# Altium PCB Core48.PcbDoc
Units mil, origin at the board's own origin, x right, y up, seen from the top; angles counter-clockwise.
Board outline 1027.57 x 2027.57 mil, 2 copper layers (Top Layer, Bottom Layer); 23 components, 43 nets, 133 pads, 49 vias.
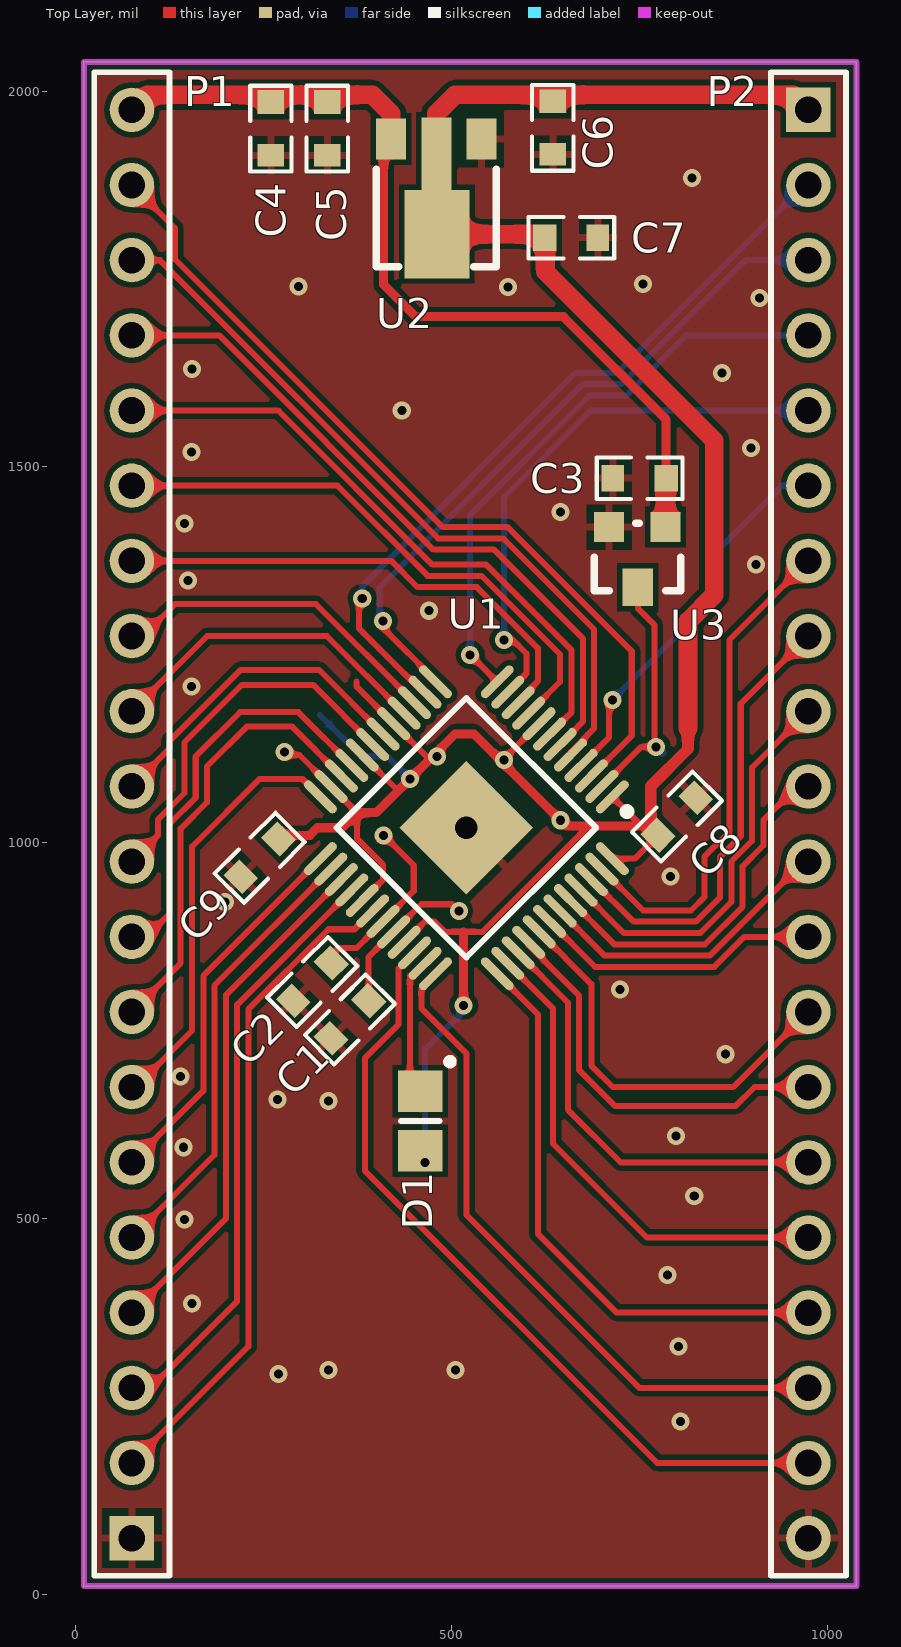
[diagram p0: Top Layer view]
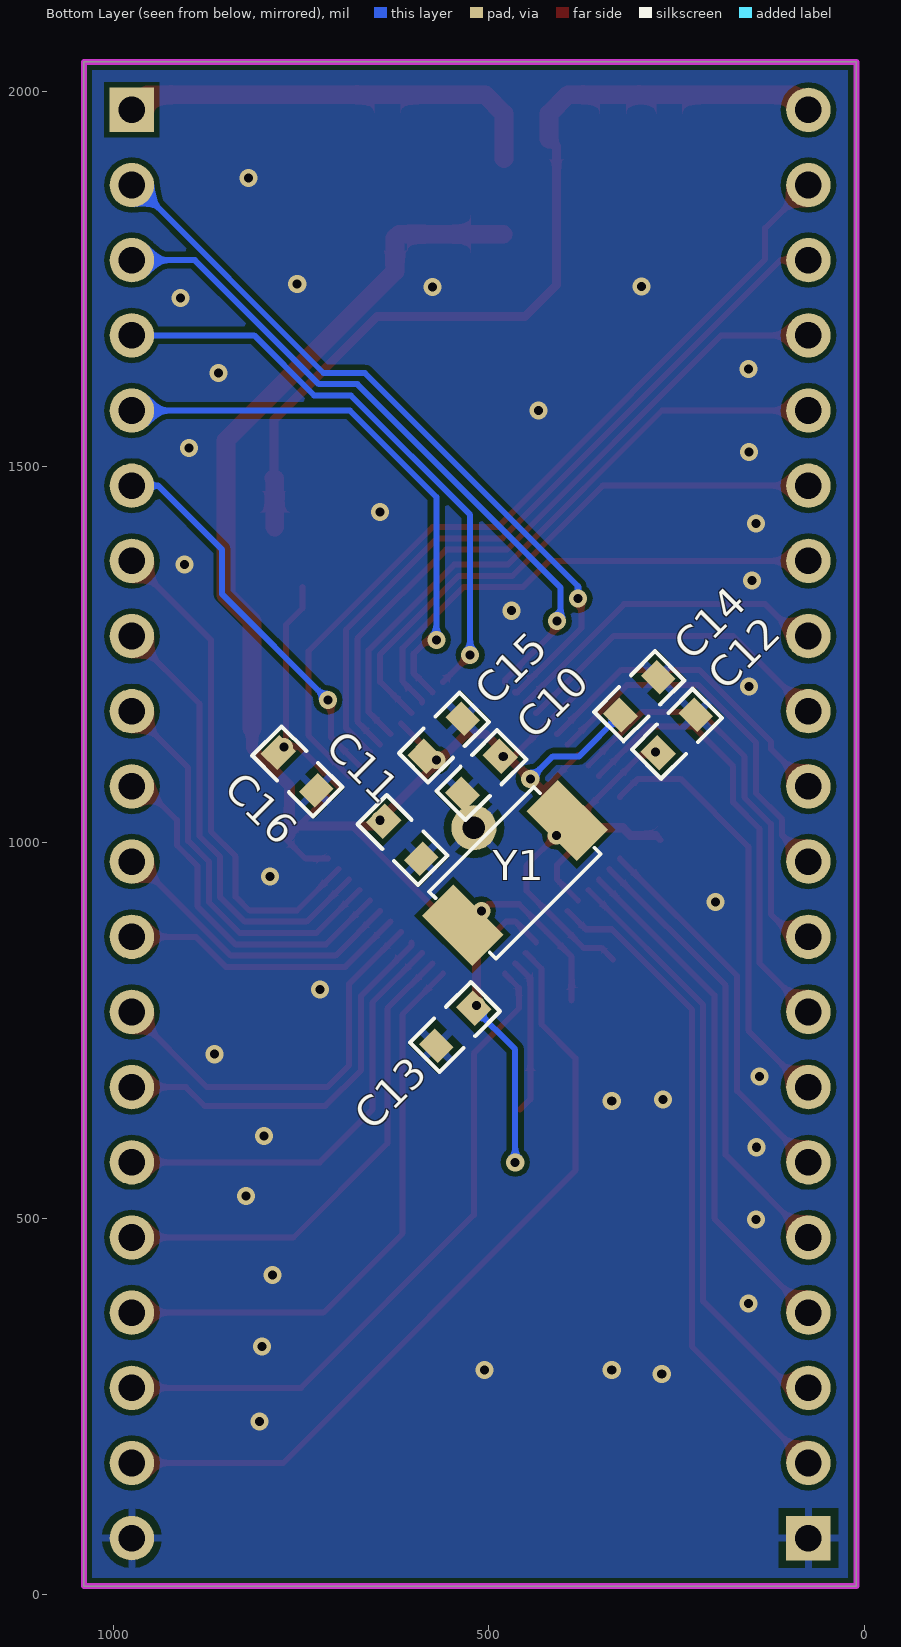
[diagram p1: Bottom Layer view, seen from below]

## Layer stack, top to bottom
Top Solder: solder mask 0.4, Solder Resist, Dk 3.5
Top Layer: signal copper 1.4
Dielectric 1: dielectric 12.6, FR-4, Dk 4.8
Bottom Layer: signal copper 1.4
Bottom Solder: solder mask 0.4, Solder Resist, Dk 3.5

## Board outline
11.22,11.22 11.22,2038.78 1038.78,2038.78 1038.78,11.22

## Design rules (kind name [scope] priority, off if disabled: settings)
Clearance [All] p1: gap=7 ignorepadtopadclearanceinfootprint=TRUE
PlaneConnect [All] p1: pad.planeconnectstyle=Relief pad.reliefexpansion=20 pad.reliefentries=4 pad.reliefconductorwidth=10 pad.reliefairgap=10 via.planeconnectstyle=Direct via.reliefexpansion=20 via.reliefentries=4 via.reliefconductorwidth=10 via.reliefairgap=10
PolygonConnect [All] p1: thpad.connectstyle=Relief thpad.reliefconductorwidth=10 thpad.reliefentries=4 thpad.polygonreliefangle="90 Angle" thpad.airgapwidth=10 smdpad.connectstyle=Relief smdpad.reliefconductorwidth=10 smdpad.reliefentries=4 smdpad.polygonreliefangle="90 Angle" smdpad.airgapwidth=10 via.connectstyle=Direct via.reliefconductorwidth=10 via.reliefentries=4 via.polygonreliefangle="90 Angle" via.airgapwidth=10
RoutingVias [All] p1: holewidth=12 width=24 viastyle="Through Hole" minholewidth=12 minwidth=24 maxholewidth=12 maxwidth=24
SolderMaskExpansion [All] p1: expansion=4
UnRoutedNet [All] p1: checkbadconnections=TRUE
Width [InNet('No Net')] p1: maxlimit=25 minlimit=8 preferedwidth=8
28 further rules are at their usual default settings.

## Components (designator, comment, footprint, x,y, rotation, side; value= is the part's Value field where it differs from the comment)
C1 "Cap" 0603C 365,765 r45 top value=100pF
C2 "Cap" 0603C 315,815 r45 top value=100pF
C3 "Cap" 0603C 750.43,1485 r0 top value=100nF
C4 "Cap" 0603C 260,1950 r90 top value=10uF
C5 "Cap" 0603C 335,1950 r90 top value=100nF
C6 "Cap" 0603C 635,1951.16 r90 top value=10uF
C7 "Cap" 0603C 659.57,1805 r180 top value=100nF
C8 "Cap" 0603C 800,1035 r225 top value=100nF
C9 "Cap" 0603C 245.05,980.05 r45 top value=100nF
C10 "Cap" 0603C 510.05,1089.95 r135 bottom value=100nF
C11 "Cap" 0603C 615,1003.79 r45 bottom value=100nF
C12 "Cap" 0603C 249.95,1145.05 r315 bottom value=100nF
C13 "Cap" 0603C 545,755 r135 bottom value=100nF
C14 "Cap" 0603C 300,1195 r315 bottom value=100nF
C15 "Cap" 0603C 560,1140 r315 bottom value=100nF
C16 "Cap" 0603C 755,1095 r45 bottom value=100nF
D1 "1N4148" 6-0805_Diode 458.79,630 r90 top
P1 "Header 20" HDR1X20 75,75 r90 top locked
P2 "Header 20" HDR1X20 975,1975 r270 top locked
U1 "ELF2_QFP48" TSQFP48-7*7 520,1020 r225 top locked
U2 "PT5110-3V3" SOT-89-3 478.18,1935.59 r180 top
U3 "REF3033" SOT23 789.88,1420.63 r180 top
Y1 "XTAL" XTAL-5032 465.43,960 r315 bottom locked

## Footprints (in the part's own frame and the unit in brackets; to place one, negate y for a bottom-side part, rotate by r counter-clockwise, add the part's x,y. Pads: shape width x height; smd on the part's side, far side on the other; paste and mask are expansions set on the pad)
6-0805_Diode [mm] "Chip Resistor, Body 2.0x1.2mm, IPC Low Density"
  rect 1.4x1.5 smd: 1(-1,0) 2(1,0)
  silkscreen extent 0,-1.1 2.1,0.65, body extent -1.07,-0.7 1.07,0.7, height 0.7
0603C [mm]
  rect 0.762x0.9 smd: 1(-0.9,0)
  rect 0.8x0.9 smd: 2(0.9,0)
  silkscreen extent -1.45,-0.7 1.45,0.7
HDR1X20 [mm] "Connector; Header; 20 Position"
  rect 1.5x1.5 hole 0.9: 1(0,0)
  round 1.5 hole 0.9: 2(2.54,0) 3(5.08,0) 4(7.62,0) 5(10.16,0) 6(12.7,0) 7(15.24,0) 8(17.78,0) 9(20.32,0) 10(22.86,0) 11(25.4,0) 12(27.94,0) 13(30.48,0) 14(33.02,0) 15(35.56,0) 16(38.1,0) 17(40.64,0) 18(43.18,0) 19(45.72,0) 20(48.26,0)
  silkscreen extent -1.27,-1.27 49.53,1.27
SOT23 [mil]
  rect 40x40 smd: 1(4.88,0.63) 3(79.88,0.63)
  rect 40x50 smd: 2(41.88,80.63)
  silkscreen extent -15,-4 100,86
SOT-89-3 [mil]
  rect 40x55 smd: 1(-61.82,-0.57) 3(58.18,-0.57)
  rect 86.61x118.11 smd: 2(-2.76,125.98)
  rect 40x110.24 smd: 2(-1.82,25.59)
  silkscreen extent -82,39 78,169
TSQFP48-7*7 [mm] "TSQFP, 48-Leads, Body 7.00x7.00mm, Pitch 0.50mm, Thermal Pad 3.20x3.20mm, IPC Medium Density"
  oval 1.45x0.3 smd: 1(-4.225,2.75) 2(-4.225,2.25) 3(-4.225,1.75) 4(-4.225,1.25) 5(-4.225,0.75) 6(-4.225,0.25) 7(-4.225,-0.25) 8(-4.225,-0.75) 9(-4.225,-1.25) 10(-4.225,-1.75) 11(-4.225,-2.25) 12(-4.225,-2.75) 25(4.225,-2.75) 26(4.225,-2.25) 27(4.225,-1.75) 28(4.225,-1.25) 29(4.225,-0.75) 30(4.225,-0.25) 31(4.225,0.25) 32(4.225,0.75) 33(4.225,1.25) 34(4.225,1.75) 35(4.225,2.25) 36(4.225,2.75)
  oval 0.3x1.45 smd: 13(-2.75,-4.225) 14(-2.25,-4.225) 15(-1.75,-4.225) 16(-1.25,-4.225) 17(-0.75,-4.225) 18(-0.25,-4.225) 19(0.25,-4.225) 20(0.75,-4.225) 21(1.25,-4.225) 22(1.75,-4.225) 23(2.25,-4.225) 24(2.75,-4.225) 37(2.75,4.225) 38(2.25,4.225) 39(1.75,4.225) 40(1.25,4.225) 41(0.75,4.225) 42(0.25,4.225) 43(-0.25,4.225) 44(-0.75,4.225) 45(-1.25,4.225) 46(-1.75,4.225) 47(-2.25,4.225) 48(-2.75,4.225)
  round 1.524 hole 0.762: 49(0,0)
  rect 3.2x3.2 smd: 49(0,0)
  silkscreen extent -4.35,-3.1 3.1,3.57, body extent -3.5,-3.5 3.5,3.5, height 1.6
XTAL-5032 [mm]
  rect 1.5x2.4 smd: 1(-2.5,0) 2(2.5,0)
  silkscreen extent -2.5,-1.6 2.5,1.6

## Part data
C1 C2 C3 C4 C5 C6 C7 C8 C9 C10 C11 C12 C13 C14 C15 C16: "Capacitor", LatestRevisionDate=17-Jul-2002, LatestRevisionNote="Re-released for DXP Platform.", PackageDescription="Radial Cap, Thru-Hole; 2 Leads; 0.3 in Pin Spacing", PackageReference=RAD-0.3, Published=8-Jun-2000, Publisher="Altium Limited"
D1: library part Diode, "Default Diode", Code_JEDEC=DO-214-AB, LatestRevisionDate=17-Jul-2002, LatestRevisionNote="Re-released for DXP Platform.", PackageDescription="DO-214-AB/SMC; 2 C-Bend Leads; Body 7.9 x 5.9 mm, inc. leads (LxW)", PackageReference=SMC, PackageVersion=Sep-1996, Published=8-Jun-2000, Publisher="Altium Limited"
P1 P2: "Header, 20-Pin", LatestRevisionDate=17-Jul-2002, LatestRevisionNote="Re-released for DXP Platform.", Publisher="Altium Limited"
U2: library part PT5110
U3: library part REF30xx
Y1: "Crystal Oscillator", LatestRevisionDate=17-Jul-2002, LatestRevisionNote="Re-released for DXP Platform.", PackageDescription="Crystal, Thru-Hole; 2 Leads; Body 3.1 x 8.2 mm (Dia.xH)", PackageReference=R38, Published=8-Jun-2000, Publisher="Altium Limited"

## Via types
v1: diameter 24, hole 12, Top Layer to Bottom Layer, 49 vias

## Nets (pads, with @x,y where several pads share a name; then routed paths per layer and width w, separated by ;. In a path a pad name is that pad's centre, name@x,y a point inside that pad or via, vN(x,y) a via of type N, cw(c..) or ccw(c..) an arc to the next point about the centre after c; other vN are vias at no path point)
3V3: C6.2 C7.2 C8.2 C9.2 C10.2 C11.2 C12.2 C13.2 C14.2 C15.2 D1.1 P2.1 U1.1 U1.8 U1.17 U1.20 U1.23 U1.29 U1.33 U1.48 U2.2 | length 3699.9
  Top Layer w8: C9.2@271.74,1003.48 C9.2@278.26,1010 ; v1@285,1116.74 297.98,1116.74 U1.23 374.73,1040 374.73,1005.33 409.34,970.71 409.34,951.1 U1.29 ; 373.92,1214.46 373.92,1207.84 U1.17 468.75,1113.01 ; U1.20 425.74,1072.5 432.5,1072.5 ; U1.33 465.02,895.42 477.16,895.42 491.08,881.5 516.29,881.5 541.5,881.5 682.08,1022.08 685,1022.08 ; v1@566,1109 567.25,1109 U1.8 ; U1.48 743.94,978.94 C8.2@770.12,1005.12 ; U1.1 753.16,1022.08 C8.2@765.29,1009.95
  Top Layer w12: C9.2@278.26,1010 311.84,1010 321.84,1020 354.73,1020 374.73,1040 400,1040 432.5,1072.5 v1(445,1085) 468.75,1108.75 ; v1@477.97,1117.97 505,1145 530,1145 566,1109 v1(645,1030) ; v1(516.29,783.71) 516.29,881.5 ; v1@652.93,1022.08 682.08,1022.08 ; 685,1022.08 753.16,1022.08
  Top Layer w15: C8.2@765.29,1009.95 765.29,1075.29 815,1125 815,1152.17
  Top Layer w25: U2.2@480,1910 480,1970 505,1995 955,1995 P2.1 ; U2.2@480.94,1809.61 619.53,1809.61 C7.2 625,1804.13 625,1760 849.85,1535.15 849.85,1329.8 815,1294.95 815,1152.17
  Bottom Layer w8: C14.2 380,1115 415,1115 v1(445,1085) ; v1(465,575) 465,725.11 C13.2 v1(516.29,783.71)
  other v1: 570.05,1110 480.94,1115 278.26,1120.67
GND: C1.1 C2.1 C3.1 C4.1 C5.1 C6.1 C7.1 C8.1 C9.1 C10.1 C11.1 C12.1 C13.1 C14.1 C15.1 C16.1 P1.1 P2.20 U1.49 U2.1 U3.3
  other v1: 805,230 270.11,293.42 336.62,298.56 505.63,298.56 801.92,330 155,387.15 787.78,425 145,498.65 823.13,530 143.78,595 798.98,610 336.62,656.58 268.73,658.79 140,689.18 865,718.73 724.65,805 198.79,921.22 791.44,955 154.17,1207.84 470,1308.7 150,1348.95 905,1370 145,1425 645.17,1440 154.17,1520 898.72,1525 434.06,1575 860,1625 155,1630 910,1725 575.15,1739.41 296.8,1740 755,1743.09 820,1884.54
IO0: P1.19 U1.3 | length 1134.5
  Top Layer w8: P1.19 132.44,1817.56 132.44,1775.99 488.43,1420 575,1420 740,1255 740,1142.56 U1.3
IO1: P1.18 U1.5 | length 998.6
  Top Layer w8: P1.18 112.22,1775 482.22,1405 568.79,1405 690,1283.79 690,1152.17 658.5,1120.67 U1.5
IO2: P1.17 U1.6 | length 920.9
  Top Layer w8: P1.17 191,1675 476,1390 557,1390 675,1272 675,1161.08 U1.6
IO3: P1.16 U1.7 | length 840.9
  Top Layer w8: P1.16 269.79,1575 474.79,1370 546.35,1370 660,1256.35 660,1173.92 U1.7
IO4: P1.15 U1.9 | length 758
  Top Layer w8: P1.15 348.58,1475 468.58,1355 540.13,1355 644.58,1250.55 644.58,1214.18 U1.9
IO5: P1.14 U1.10 | length 671.5
  Top Layer w8: P1.14 420,1375 455,1340 533.92,1340 615,1258.92 615,1215 588.9,1188.9 U1.10
IO6: P1.13 U1.15 | length 448
  Top Layer w8: P1.13 90,1275 132.44,1317.44 320,1317.44 U1.15
IO7: P1.12 U1.16 | length 446.1
  Top Layer w8: P1.12 175,1275 334.6,1275 U1.16
IO8: P1.11 U1.18 | length 451.3
  Top Layer w8: P1.11@86.5,1075 P1.11 125,1125 125,1135 220,1230 323.92,1230 U1.18
IO9: P1.10 U1.19 | length 502.5
  Top Layer w8: P1.10 110,1010 110,1031.21 145,1066.21 145,1133.5 221.5,1210 316.08,1210 U1.19
IO10: P1.9 U1.21 | length 548.3
  Top Layer w8: P1.9 95,875 125,905 125,1025 160,1060 160,1115 218.9,1173.9 296.5,1173.9 U1.21
IO11: P1.8 U1.22 | length 596.3
  Top Layer w8: P1.8 140,840 140,1018.79 175,1053.79 175,1101.74 228.26,1155 287.56,1155 U1.22
IO12: P1.7 U1.24 | length 574.1
  Top Layer w8: P1.7 80,675 155,750 155,995 245,1085 301.89,1085 U1.24
IO13: P1.6 U1.25 | length 507.8
  Top Layer w8: P1.6 170,670 170,823.11 U1.25
IO14: P1.5 U1.26 | length 599.7
  Top Layer w8: P1.5 185,585 185,810.27 U1.26
IO15: P1.4 U1.27 | length 691.5
  Top Layer w8: P1.4 200,500 200,797.44 U1.27
IO16: P1.3 U1.28 | length 798
  Top Layer w8: P1.3 100,275 215,390 215,784.6 U1.28
IO17: P1.2 U1.30 | length 887.3
  Top Layer w8: P1.2 230,330 230,778.38 336.62,885 371.08,885 U1.30
IO18: P2.19 U1.34 | length 1068.3
  Top Layer w8: U1.34 430,832.56 430,758.5 385,713.5 385,563.79 773.79,175 P2.19
IO19: P2.18 U1.36 | length 913.8
  Top Layer w8: U1.36 460,806.89 460,780 520,720 520,505 750,275 P2.18 P2.18@985,275
IO20: P2.17 U1.37 | length 771.7
  Top Layer w8: U1.37 615,771.89 615,480 720,375 P2.17
IO21: P2.16 U1.38 | length 656.4
  Top Layer w8: U1.38 635,779.73 635,600 760,475 P2.16
IO22: P2.15 U1.39 | length 585
  Top Layer w8: U1.39 655,787.56 655,645 725,575 P2.15
IO23: P2.14 U1.40 | length 532.9
  Top Layer w8: U1.40 602.82,863.65 670,796.47 670,697.55 717.55,650 878.3,650 903.3,675 P2.14
IO24: P2.13 U1.41 | length 548.6
  Top Layer w8: U1.41 686.34,811.9 686.34,703.66 715,675 875,675 P2.13
IO25: P2.12 U1.42 | length 385.9
  Top Layer w8: U1.42 691.08,835 849.85,835 889.85,875 P2.12
IO26: P2.11 U1.43 | length 406.8
  Top Layer w8: U1.43 703.92,850 843.64,850 968.64,975 P2.11
IO27: P2.10 U1.44 | length 478.8
  Top Layer w8: U1.44 716.76,865 837.43,865 887.5,915.07 887.5,968.86 915,996.36 915,1030 960,1075 P2.10
IO28: P2.9 U1.45 | length 537
  Top Layer w8: U1.45 729.6,880 831.21,880 872.5,921.29 872.5,975.07 900,1002.57 900,1100 P2.9
IO29: P2.8 U1.46 | length 604
  Top Layer w8: U1.46 742.44,895 825,895 857.5,927.5 857.5,981.29 885,1008.79 885,1185 P2.8
IO30: P2.7 U1.47 | length 671
  Top Layer w8: U1.47 755.27,910 818.79,910 836.89,928.11 836.89,981.89 870,1015 870,1270 P2.7
NetC1_2: C1.2 U1.32 Y1.2 | length 210.8
  Top Layer w8: C1.2 390.05,848.3 U1.32 460,918.24 501.1,918.24 v1(510,909.34)
NetC2_2: C2.2 U1.31 Y1.1 | length 250.2
  Top Layer w8: C2.2@335.05,845.05 350,860 373.92,860 U1.31 450,936.08 450,970 v1(410,1010) v1@405,1015
NetD1_2: D1.2 U1.35 | length 208.7
  Top Layer w8: D1.2@458.79,645 445,658.79 445,819.73 U1.35
RePGM: P2.6 U1.4 | length 516.3
  Top Layer w8: U1.4 710,1140.4 v1@710,1190
  Bottom Layer w8: v1(714.18,1190) 855,1330.82 855,1390 940,1475 P2.6
TCK: P2.4 U1.12 | length 786
  Top Layer w8: v1(525,1250) 560.82,1214.18 U1.12
  Bottom Layer w8: v1(525,1250) 525,1436.21 683.79,1595 732.43,1595 812.43,1675 P2.4
TDI: P2.3 U1.13 | length 907.2
  Top Layer w8: v1(409.34,1295) 409.34,1285.66 478.94,1216.06 U1.13
  Bottom Layer w8: v1(409.34,1295) 409,1295 404.5,1299.5 404.5,1339.5 675,1610 726.21,1610 891.21,1775 P2.3
TDO: P2.2 U1.14 | length 995.7
  Top Layer w8: v1(381.5,1325) 377,1320.5 377,1285.47 462.22,1200.26 U1.14
  Bottom Layer w8: v1(381.5,1325) 381.5,1341.5 665,1625 720,1625 970,1875 P2.2
TMS: P2.5 U1.11 | length 741.9
  Top Layer w8: v1(570,1270) 581.49,1270 600,1251.49 600,1225.27 U1.11
  Bottom Layer w8: v1(570,1270) 570,1460 685,1575 P2.5
Vin: C3.2 C4.2 C5.2 P1.20 U2.3 U3.1 | length 1188.9
  Top Layer w12: U2.3 410,1926.16 410,1742.57 452.57,1700 648.94,1700 785.87,1563.07 C3.2
  Top Layer w25: P1.20 95,1995 395,1995 420,1970 U2.3 ; U3.1 785,1484.13 C3.2
VRef33: C16.2 U1.2 U3.2 | length 313
  Top Layer w8: U1.2 752.84,1127.56 v1(772.44,1127.56) ; U3.2 748,1312 770,1290 770,1140.79
  Bottom Layer w12: v1(772.44,1127.56) 779.95,1120.05 C16.2

## Polygon pours and split planes (outlines as drawn)
GND on Bottom Layer "GND_L02_P002" (solid, remove dead copper, pour order 2): 11.22,2038.78 1038.78,2038.78 1038.78,11.22 11.22,11.22
GND on Top Layer "GND_L01_P000" (solid, remove dead copper, pour order 0): 11.22,2038.78 1038.78,2038.78 1038.78,11.22 11.22,11.22

## Keep-outs
Keep-Out Layer:
  the board outline again, w8